# Altium PCB PCB1.PcbDoc
Units mm, origin at the board's own origin, x right, y up, seen from the top; angles counter-clockwise.
Board outline 86.99 x 68.2 mm, 2 copper layers (Top Layer, Bottom Layer); 32 components, 40 nets, 178 pads, 100 vias.
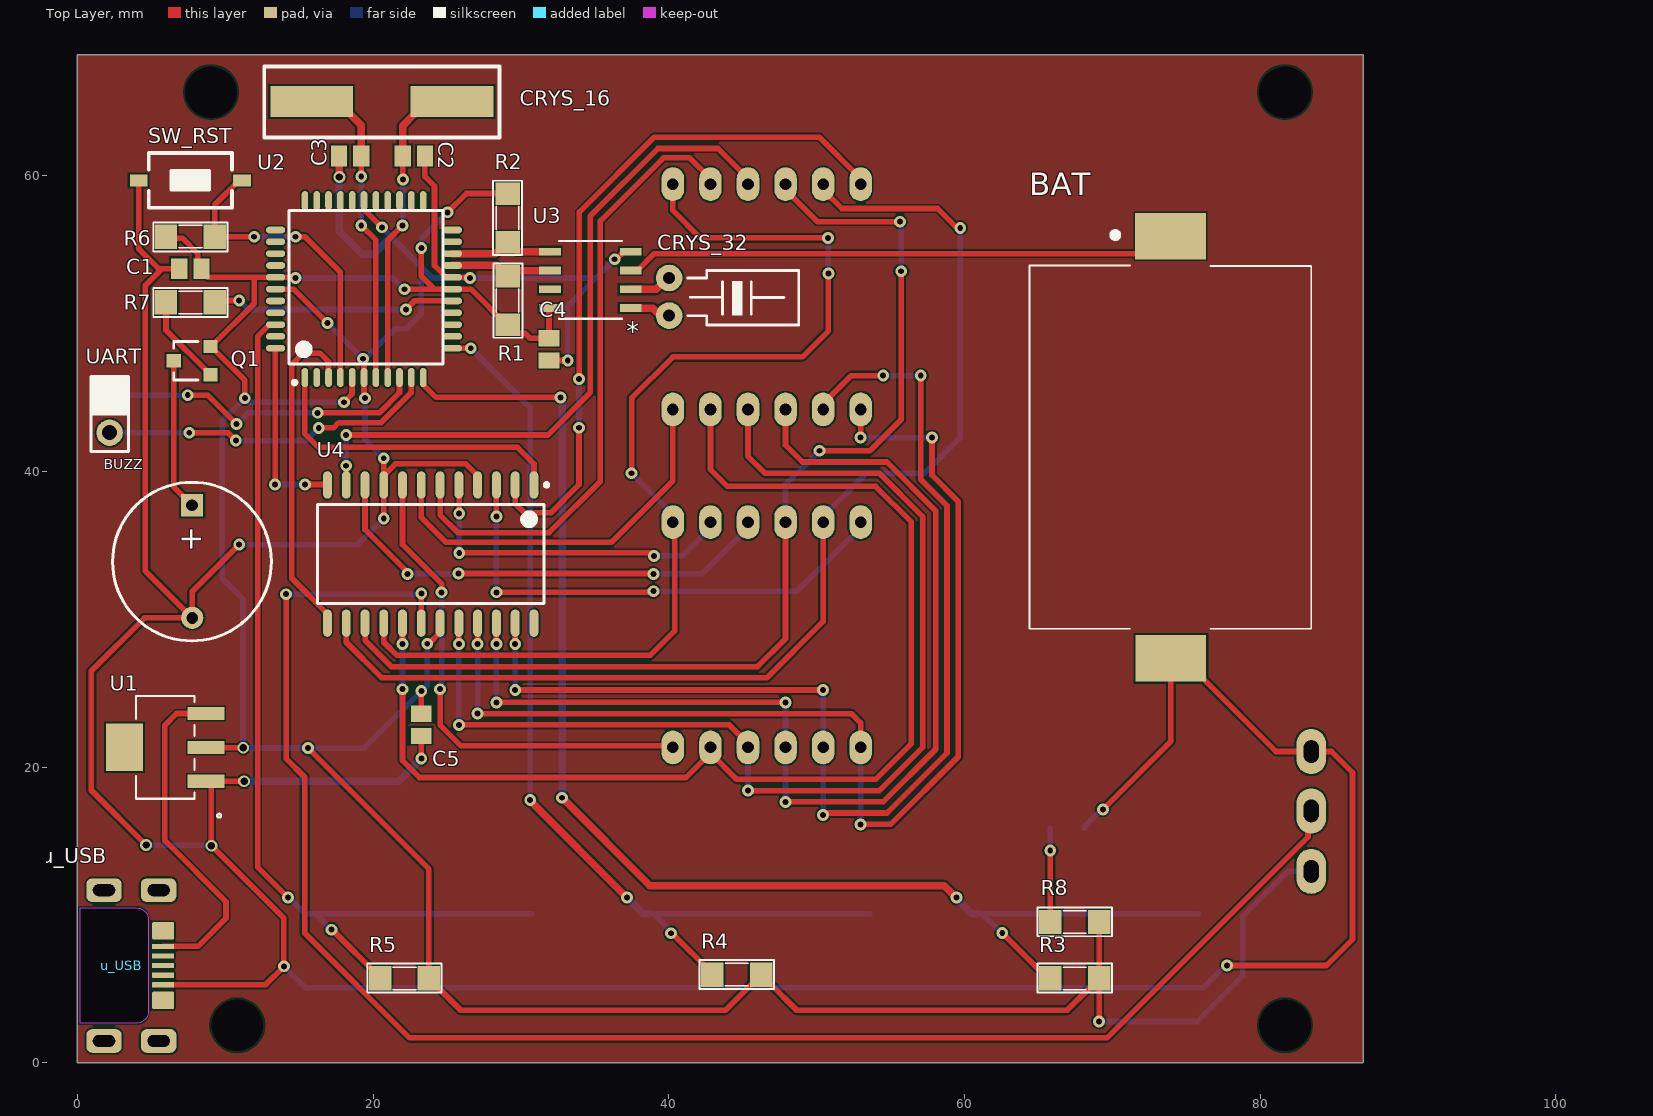
[diagram p0: Top Layer view]
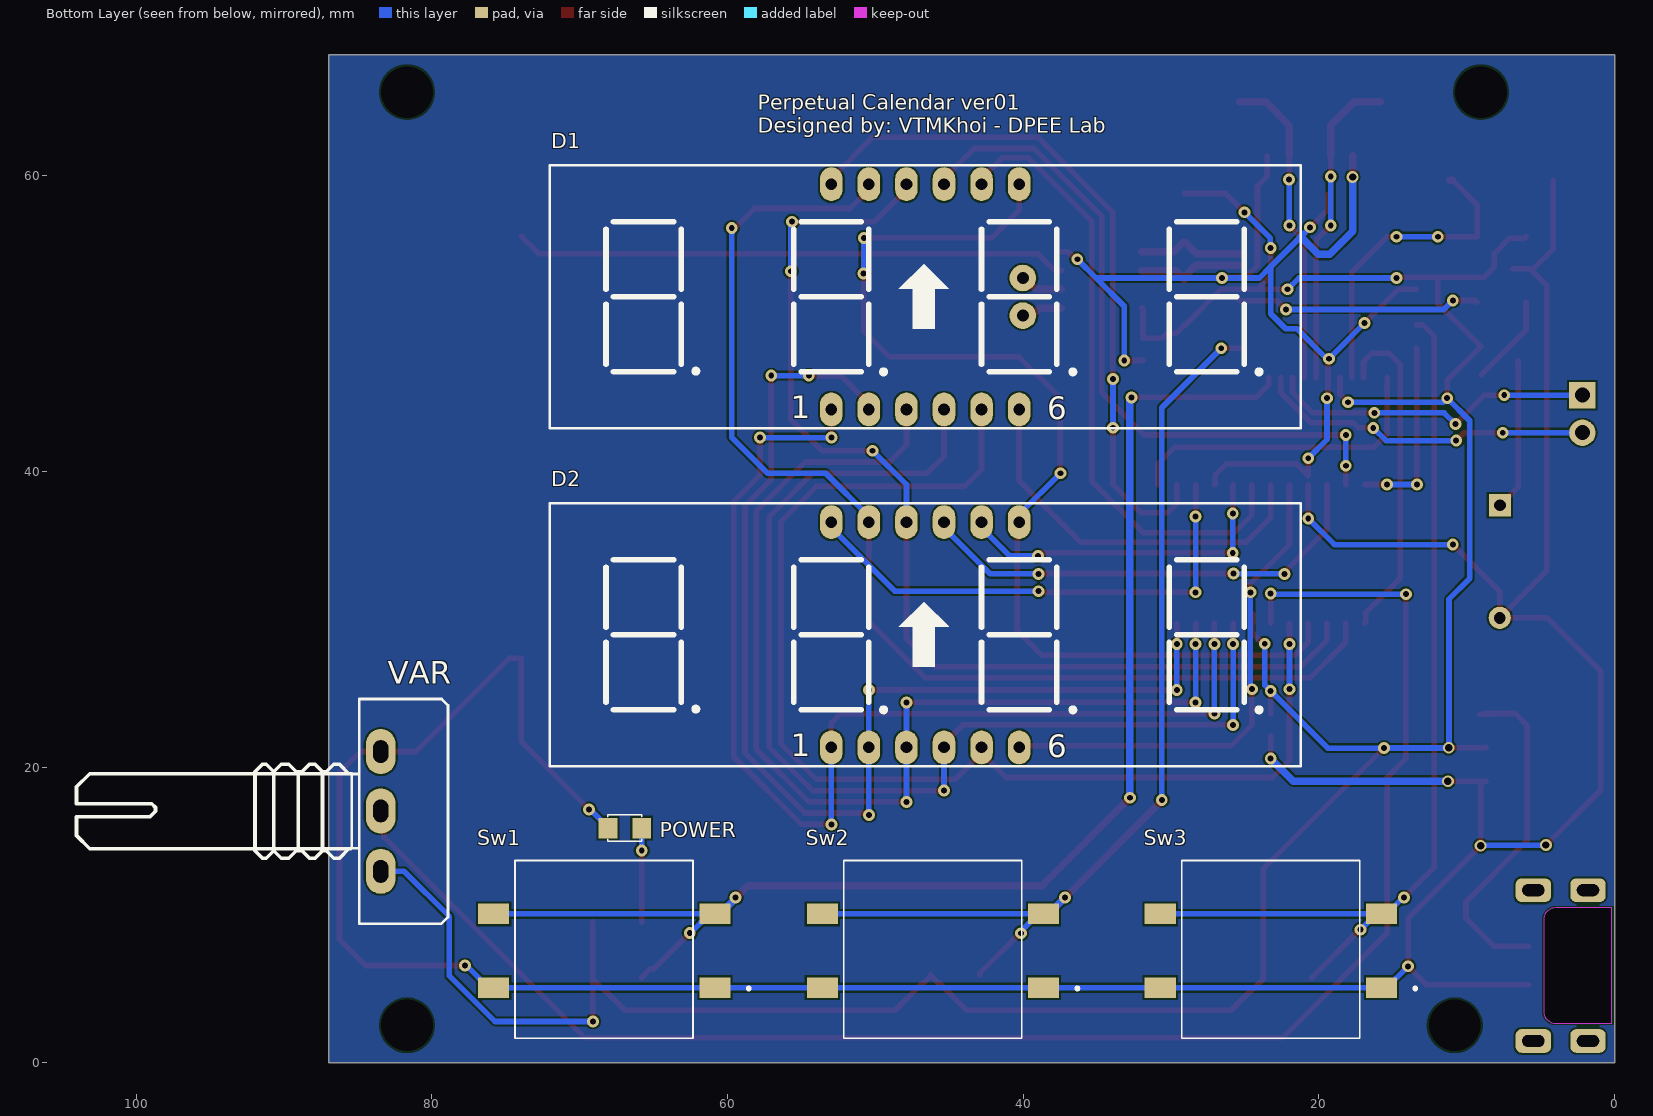
[diagram p1: Bottom Layer view, seen from below]

## Layer stack, top to bottom
Top Solder: solder mask 0.0102, Solder Resist, Dk 3.5
Top Layer: signal copper 0.0356
Dielectric 1: dielectric 0.32, FR-4, Dk 4.8
Bottom Layer: signal copper 0.0356
Bottom Solder: solder mask 0.0102, Solder Resist, Dk 3.5

## Board outline
0,0 0,68.199 86.995,68.199 86.995,0

## Design rules (kind name [scope] priority, off if disabled: settings)
Clearance [All] p1: gap=0.127 ignorepadtopadclearanceinfootprint=FALSE
PolygonConnect [All] p1: connectstyle=Relief reliefconductorwidth=0.254 reliefentries=4 polygonreliefangle="90 Angle" airgapwidth=0.254
RoutingVias [All] p1: holewidth=0.5 width=0.8 viastyle="Through Hole" minholewidth=0.4 minwidth=0.8 maxholewidth=0.6 maxwidth=0.8
SolderMaskExpansion [All] p1: expansion=0.102 istentingtop=FALSE
Width [All] p1: maxlimit=1.016 minlimit=0.254 preferedwidth=0.508
30 further rules are at their usual default settings.

## Components (designator, comment, footprint, x,y, rotation, side; value= is the part's Value field where it differs from the comment)
BAT "796136-1" TE_796136-1 73.939,42.037 r270 top
BUZZ "Buzzer" SPEAKER 7.76,37.719 r270 top
C1 "0.1uF" C0805 7.645,53.721 r0 top value=33p
C2 "22pF" C0805 22.758,61.341 r0 top value=33p
C3 "22pF" C0805 18.452,61.341 r180 top value=33p
C4 "0.1uF" C0805 31.902,48.26 r90 top value=33p
C5 "0.1uF" C0805 23.266,22.86 r90 top value=33p
CRYS_16 "16MHz" ABLS2-8.000MHZ-D4Y-T 20.599,65.024 r0 top value=8MHz
CRYS_32 "32.768Khz" XT32k 40.03,53.086 r0 top value=4Mhz
D1 "Above" 7SEGQ 52.984,44.196 r180 bottom value="LED 7Q SEG"
D2 "Below" 7SEGQ 52.984,21.336 r180 bottom value="LED 7Q SEG"
POWER "LED SMD" SM-LED-0805-Red 65.811,15.875 r0 bottom (schematic designator LED_R)
Q1 "SA1015" SOT23-321 7.772,47.498 r90 top value=A1015
R1 "4k7" SM-RES-1206 29.108,53.213 r270 top value="R1/4W - 1K"
R2 "4k7" SM-RES-1206 29.108,55.499 r90 top value="R1/4W - 1K"
R3 "1k" SM-RES-1206 65.811,5.715 r0 top value="R1/4W - 1K"
R4 "1k" SM-RES-1206 42.951,5.969 r0 top value="R1/4W - 1K"
R5 "1k" SM-RES-1206 20.472,5.715 r0 top value="R1/4W - 1K"
R6 "1k" SM-RES-1206 9.296,55.88 r180 top value="R1/4W - 1K"
R7 "1k" SM-RES-1206 9.296,51.435 r180 top value="R1/4W - 1K"
R8 "330r" SM-RES-1206 65.811,9.525 r0 top value="R1/4W - 1K"
Sw1 "Mode" SW_1571527-1 68.326,7.457 r0 bottom (schematic designator SW1)
Sw2 "Adjust" SW_1571527-1 46.101,7.457 r0 bottom (schematic designator SW2)
Sw3 "Increase" SW_1571527-1 23.241,7.457 r0 bottom (schematic designator SW3)
SW_RST "RST" SW1-SMD 7.645,59.69 r0 top value="SW chip 2 pin"
U1 "AMS1117" SOT_AMS_ADS 5.944,21.336 r90 top
U2 "ATmega32A-AU" TQFP44 19.392,52.336 r90 top
U3 "ds1307zn+" 21-0041B_8_MXM 34.696,52.959 r180 top
U4 "MAX7219ENG" SO24 23.901,34.417 r270 top
u_USB "POWER" USB-Micr-B-FCI-SMD 0.203,6.579 r270 top
UART "" HEADER-1X2 2.184,45.161 r0 top
VAR "10K" VR-S1 83.464,17.018 r270 bottom value="Volume 50k"

## Footprints (in the part's own frame and the unit in brackets; to place one, negate y for a bottom-side part, rotate by r counter-clockwise, add the part's x,y. Pads: shape width x height; smd on the part's side, far side on the other; paste and mask are expansions set on the pad)
7SEGQ [mil] "DIP 12 Leads; Body 48 x 20 mm; Pitch 0.5 mm"
  oval 60x90 hole 31: 1(0,0) 2(100,0) 3(200,0) 4(300,0) 5(400,0) 6(500,0) 7(500,600) 8(400,600) 9(300,600) 10(200,600) 11(100,600) 12(0,600)
  silkscreen extent -750,-50 1250,650, body extent -720,-80 1260,668, height 565
21-0041B_8_MXM [mil]
  rect 57.5x21 smd paste+0 mask+0: 1(-107.25,75) 2(-107.25,25) 3(-107.25,-25) 4(-107.25,-75) 5(107.25,-75) 6(107.25,-25) 7(107.25,25) 8(107.25,75)
  silkscreen extent -84,-104 84,104, body extent -122,-99 122,99, height 69
ABLS2-8.000MHZ-D4Y-T [mm]
  rect 5.6x2.1 smd: 1(-4.75,0) 2(4.75,0)
  silkscreen extent -7.95,-2.44 7.95,2.36
C0805 [mm] "Chip Capacitor, Body 2.0x1.3mm, IPC High Density"
  rect 1.1x1.4 smd: 1(-0.75,0) 2(0.75,0)
  body extent -1.1,-0.72 1.1,0.72, height 1.4
HEADER-1X2 [mil]
  rect 70x70 hole 40: 1(0,0)
  round 70 hole 40: 2(0,-100)
  silkscreen extent -50,-150 50,50, body extent -50,-150 50,50, height 470
SM-LED-0805-Red [mil]
  rect 50x55 smd: 1(0,0) 2(90,0)
  silkscreen extent 0,-35 90,35, body extent 5,-25 85,25, height 43
SM-RES-1206 [mil]
  rect 60x65 smd: 1(0,0) 2(130,0)
  silkscreen extent -34,-38 164,39, body extent 2,-31 128,32, height 40
SO24 [mm] "SOIC, 24-Leads, Body 15.30x7.50mm, Pitch 1.27mm, IPC Medium Density"
  oval 1.85x0.6 smd: 1(-4.675,6.985) 2(-4.675,5.715) 3(-4.675,4.445) 4(-4.675,3.175) 5(-4.675,1.905) 6(-4.675,0.635) 7(-4.675,-0.635) 8(-4.675,-1.905) 9(-4.675,-3.175) 10(-4.675,-4.445) 11(-4.675,-5.715) 12(-4.675,-6.985) 13(4.675,-6.985) 14(4.675,-5.715) 15(4.675,-4.445) 16(4.675,-3.175) 17(4.675,-1.905) 18(4.675,-0.635) 19(4.675,0.635) 20(4.675,1.905) 21(4.675,3.175) 22(4.675,4.445) 23(4.675,5.715) 24(4.675,6.985)
  silkscreen extent -4.8,-7.65 3.35,7.96, body extent -5.2,-7.83 5.2,7.57, height 2.6
SOT23-321 [mm]
  rect 0.9x0.95 smd mask+0: 1(0.95,-1.25)
  rect 0.9x0.95 smd: 2(0,1.25) 3(-0.95,-1.25)
  silkscreen extent -1.3,-0.38 1.3,1.25, body extent -1.52,-1.23 1.48,1.27, height 1.06
SOT_AMS_ADS [mil]
  rect 35x98 smd paste+0 mask+0: 1(-90.16,-108.5) 2(0,-108.5) 3(90.16,-108.5)
  rect 126x98 smd paste+0 mask+0: 4(0,108.5)
  silkscreen extent -187,-148 137,78, body extent -132,-143 132,144, height 71
SPEAKER [mm]
  rect 1.5x1.5 hole 0.8: 1(0,0)
  round 1.5 hole 0.8: 2(7.62,0.013)
  silkscreen extent -1.55,-5.38 9.18,5.36, body extent -2.22,-6 13.24,6, height 3.5
SW1-SMD [mm]
  rect 1.2x0.8 smd: 1(-3.5,0) 2(3.5,0)
  silkscreen extent -2.82,-1.85 2.82,1.85, body extent -3.05,-1.85 3.05,1.85, height 2.5
SW_1571527-1 [mm]
  rect 2.1x1.4 smd: 1(-7.468,2.377) 2(7.496,2.377) 3(-7.468,-2.623) 4(7.496,-2.623)
  silkscreen extent -9.85,-6.22 6.05,5.79
TE_796136-1 [mm]
  rect 3.15x4.78 smd: 1(-13.868,0) 2(14.681,0.025)
  silkscreen extent -14.16,-9.53 12.67,9.53
TQFP44 [mm] "TQFP, 44-Leads, Body 10X10mm, Pitch 0.80mm, IPC High Density"
  oval 1.3x0.45 smd: 1(-5.981,4) 2(-5.981,3.2) 3(-5.981,2.4) 4(-5.981,1.6) 5(-5.981,0.8) 6(-5.981,0) 7(-5.981,-0.8) 8(-5.981,-1.6) 9(-5.981,-2.4) 10(-5.981,-3.2) 11(-5.981,-4) 23(5.981,-4) 24(5.981,-3.2) 25(5.981,-2.4) 26(5.981,-1.6) 27(5.981,-0.8) 28(5.981,0) 29(5.981,0.8) 30(5.981,1.6) 31(5.981,2.4) 32(5.981,3.2) 33(5.981,4)
  oval 0.45x1.3 smd: 12(-4,-5.981) 13(-3.2,-5.981) 14(-2.4,-5.981) 15(-1.6,-5.981) 16(-0.8,-5.981) 17(0,-5.981) 18(0.8,-5.981) 19(1.6,-5.981) 20(2.4,-5.981) 21(3.2,-5.981) 22(4,-5.981) 34(4,5.981) 35(3.2,5.981) 36(2.4,5.981) 37(1.6,5.981) 38(0.8,5.981) 39(0,5.981) 40(-0.8,5.981) 41(-1.6,5.981) 42(-2.4,5.981) 43(-3.2,5.981) 44(-4,5.981)
  silkscreen extent -6.45,-5.33 5.33,5.07, body extent -5.99,-5.96 6.01,6.04, height 1.05
USB-Micr-B-FCI-SMD [mm]
  round 0.508 on Mech15: 0(0,0)
  rrect20% 0.35x1.5 smd: 1(-1.3,5.6) 2(-0.65,5.6) 3(0,5.6) 4(0.65,5.6) 5(1.3,5.6)
  rrect50% 1.6x2.4 hole 0.8 slot 1.5 at 90 deg: SH(-5.1,5.3) SH(-5.1,1.6) SH(5.1,5.3) SH(5.1,1.6)
  rrect20% 1.2x1.5 smd: SH(-2.35,5.6) SH(2.35,5.6)
  Keep-Out Layer board cut-out: -3.9,0 -3.9,3.797 -3.839,4.103 -3.666,4.362 -3.406,4.536 -3.1,4.597 -3.1,4.597 3.1,4.597 3.406,4.536 3.666,4.362 3.839,4.103 3.9,3.797 3.9,3.797 3.9,0
  body extent -5.25,-1.12 5.25,5.8, height 2.15
VR-S1 [mil]
  oval 120x78.74 hole 40 slot 60 at 0 deg: 1(-159,0) 2(-1,0) 3(160,0)
  silkscreen extent -299,-810 300,179, body extent -310,-818 310,188, height 840
XT32k [mm]
  round 1.8 hole 0.813: 1(0,0) 2(0,-2.54)
  silkscreen extent 1.27,-3.17 8.76,0.51, body extent -0.15,-2.42 8.2,-0.12, height 1.95

## Part data
BAT: "BATTERY HOLDER; No. of Batteries:1; Terminal Type:Surface Mount; For Use With:CR2032 Batteries; Accessory Type:Battery Holder; Battery Size Code:2032", Package=None, Availability=Unavailable, EU_RoHS_Compliance=Compliant, MF="TE Connectivity", MP=796136-1, Number_of_Positions=2, Price=None, SnapEDA_Link=https://www.snapeda.com/parts/796136-1/TE%20Connectivity%20AMP%20Connectors/view-part/761452/?ref=snap, TE_purchase_URL=https://www.te.com/usa-en/product-796136-1.html?te_bu=Cor&te_type=disp&te_campaign=seda_glo_cor-seda-global-disp-prtnr-fy19-seda-model-bom-cta_sma-317_1&elqCampaignId=32493
C1 C2 C3 C4 C5: library part CapSMD, "Capacitor", LatestRevisionDate=17-Jul-2002, LatestRevisionNote="Re-released for DXP Platform.", PackageReference=RAD-0.3, Published=8-Jun-2000, Publisher="Altium Limited"
CRYS_16: library part ABLS2-8.000MHZ-D4Y-T, "Crystal, 8 MHz, SMD, 11.4mm x 4.7mm, 30 ppm, 18 pF, 30 ppm, ABLS2 Series", Manufacturer=ABRACON, Component Type=Crystal, Manufacturer Part No=ABLS2-8.000MHZ-D4Y-T
CRYS_32: library part XT2, "Crystal, 32.768 KHz, -40 to 85 degC, 3.2 x 1.5 x 0.9 mm SMD"
D1 D2: library part LED7Q, "Four 7 Seg Dipslay"
POWER: library part LED-SMD-0805
Q1: library part 2SA1015, "PNP 600mW, ECB"
R1 R2 R3 R4 R5 R6: library part R, "Resistor 1/4W"
R7 R8: library part R, "Resistor for buzzer"
Sw1 Sw2 Sw3: library part 1571527-1, "Switch Tactile OFF _ON_ Round Button Gull Wing 0.05A 12VDC 0.98N SMD Bulk", Package="SMD-6 Omron Electronics", Availability=Unavailable, EU_RoHS_Compliance=Compliant, MF="TE Connectivity", MP=1571527-1, Price=None, SnapEDA_Link=https://www.snapeda.com/parts/1571527-1/TE%20Connectivity/view-part/244428/?ref=snap, TE_purchase_URL=https://www.te.com/usa-en/product-1571527-1.html?te_bu=Cor&te_type=disp&te_campaign=seda_glo_cor-seda-global-disp-prtnr-fy19-seda-model-bom-cta_sma-317_1&elqCampaignId=32493
SW_RST: library part SW2, "Switch button 2 pin"
U1: "No Description Available", Built_By=EMA_Matt, Copyright="Copyright (C) 2018 Accelerated Designs. All rights reserved", Manufacturer_Part_Number=AMS1117, RefDes=RefDes, SourceLibrary=Advanced_Monolithic_Systems_10-16-2019, Type=DEV, Vendor="Advanced Monolithic Systems"
U2: "8/16-bit AVR XMEGA A4 Microcontroller, 1.6-3.6V, 32KB + 4KB Flash, 1KB EEPROM, 4KB SRAM, 44-pin TQFP, Industrial Grade (-40°C to 85°C), Pb-Free", Supplier Part Number 1=ATXMEGA32A4-AU-ND, ComponentLink1Description="Manufacturer Link", ComponentLink1URL=http://www.atmel.com/products/avr/default.asp?, ComponentLink2Description="ATxmega16A4/32A4/64A4/128A4 Datasheet", ComponentLink2URL=http://www.atmel.com/dyn/resources/prod_documents/doc8069.pdf, ComponentLink3Description="Atmel.com Home", ComponentLink3URL=http://www.atmel.com, DatasheetVersion="revN, Feb-2010", PackageDescription="44-Pin Plastic Thin Profile Quad Flat Pack, 10 x 10 x 1.0 mm Body, 0.8 mm Pitch (TQFP)", PackageReference=44A, PackageVersion="rev.B, Oct-2001", Published=1-Apr-2010, Publisher="Altium Limited", Supplier 1=Digi-Key, Supplier 2=Farnell, Supplier 3=Mouser, Supplier Part Number 2=1748557, Supplier Part Number 3=556-ATXMEGA32A4-AU
U3: "No Description Available", Mfr_Name="Maxim Integrated Products", Copyright="Copyright (C) 2021 Ultra Librarian. All rights reserved.", Manufacturer_Part_Number=ds1307zn+, RefDes=RefDes, Type=DEV
U4: "Serially Interfaced, 8-Digit LED Display Driver", Code_JEDEC=MS-001-AF, ComponentLink1Description="Manufacturer Link", ComponentLink1URL=http://www.maxim-ic.com/, ComponentLink2Description=Datasheet, ComponentLink2URL=http://pdfserv.maxim-ic.com/en/ds/MAX7219-MAX7221.pdf, DatasheetVersion=Jul-1997, LatestRevisionDate=29-May-2009, LatestRevisionNote="Component Body Added.", PackageDescription="DIP, 24-Pin, Row Spacing 7.62 mm, Pitch 2.54 mm", PackageReference=NG24A, PackageVersion=1997, Published=16-Jan-2001, Publisher="Altium Limited"
u_USB: library part "USB M"
UART: library part HEADER-1X2, Supplier Part Number 1=S1011E-36-ND, REEL=TH, Supplier 1=Digi-Key
VAR: library part VR-S, "Var Resistor"

## Free pads (board coordinates)
  round 1.524 hole 3.5: 2(10.82,2.54) 2(81.686,2.54) 2(81.686,65.659) 3(9.042,65.659)

## Via types
v1: diameter 0.8/0.8 (per signal layer), hole 0.4, Top Layer to Bottom Layer, 94 vias
v2: diameter 0.8, hole 0.5, Top Layer to Bottom Layer, 5 vias
v3: diameter 0.8, hole 0.4, Top Layer to Bottom Layer, 1 vias

## Nets (pads, with @x,y where several pads share a name; then routed paths per layer and width w, separated by ;. In a path a pad name is that pad's centre, name@x,y a point inside that pad or via, vN(x,y) a via of type N, cw(c..) or ccw(c..) an arc to the next point about the centre after c; other vN are vias at no path point)
Adjust: R4.1 Sw2.3 Sw2.4 U2.12 | length 65.5
  Top Layer w0.381: U2.12 v1(26.61,48.336) v1@26.661,48.387 ; v1(40.157,8.763) 40.221,8.763 42.951,6.033 R4.1
  Top Layer w0.508: v1(30.632,17.78) 30.632,17.725 v1(37.181,11.176)
  Bottom Layer w0.381: v1(26.61,48.336) 30.632,44.314 v1(30.632,17.78) ; Sw2.3 Sw2.3@38.983,10.08 ; v1(40.157,8.763) 40.133,8.787 40.133,8.93 Sw2.3@38.983,10.08 ; Sw2.4 Sw2.3@38.983,10.08
  Bottom Layer w0.508: v1(37.181,11.176) 37.187,11.176 38.283,10.08 Sw2.3
Buzzer: R7.1 U2.16 | length 16.6
  Top Layer w0.381: R7.1 9.423,51.562 v1(10.947,51.562) ; v1(22.225,50.952) 22.822,51.549 25.36,51.549 U2.16
  Bottom Layer w0.381: v1(10.947,51.562) 11.557,50.952 v1(22.225,50.952)
CLK: U2.3 U4.13 | length 22.6
  Top Layer w0.381: U4.13 16.845,29.814 16.845,30.439 14.503,32.78 14.503,47.244 15.265,48.006 16.408,48.006 16.992,47.422 U2.3
Dig0: D1.12 U4.2 | length 47.7
  Top Layer w0.381: U4.2 29.616,37.846 30.251,37.211 32.029,37.211 33.934,39.116 v1(33.934,42.958) ; v1(33.934,46.253) 33.96,46.279 33.96,57.556 39.014,62.611 50.19,62.611 52.984,59.817 D1.12
  Bottom Layer w0.381: v1(33.934,42.958) v1(33.934,46.253)
Dig1: D1.9 U4.11 | length 46.8
  Top Layer w0.381: U4.11 v3(18.186,40.386) ; v1(18.186,42.469) 31.826,42.469 34.696,45.339 34.696,57.277 39.268,61.849 43.332,61.849 45.364,59.817 D1.9
  Bottom Layer w0.381: v3(18.186,40.386) v1(18.186,42.469)
Dig2: D1.8 U4.6 | length 42.6
  Top Layer w0.381: U4.6 24.536,37.059 25.73,35.865 31.91,35.865 35.382,39.337 35.382,56.947 39.649,61.214 41.427,61.214 42.824,59.817 D1.8
Dig3: D1.6 U4.7 | length 26.5
  Top Layer w0.381: U4.7 23.266,36.881 24.937,35.211 36.125,35.211 40.284,39.37 D1.6
Dig4: D2.12 U4.3 | length 34.1
  Top Layer w0.381: v1(28.346,31.826) 38.887,31.826 v1(38.964,31.902) ; v1(28.346,36.957) U4.3
  Bottom Layer w0.381: v1(28.346,31.826) v1(28.346,36.957) ; v1(38.964,31.902) 48.692,31.902 52.984,36.195 D2.12
Dig5: D2.9 U4.10 | length 32
  Top Layer w0.381: U4.10@19.437,39.073 U4.10 19.456,36.068 22.327,33.198 v1(22.327,33.071) ; v1(25.781,33.096) 38.938,33.096 v1(38.964,33.071) ; D2.9@45.345,36.557 D2.9
  Bottom Layer w0.381: v1(22.327,33.071) 25.756,33.071 v1(25.781,33.096) ; v1(38.964,33.071) 42.24,33.071 45.364,36.195 D2.9
Dig6: D2.8 U4.5 | length 22.9
  Top Layer w0.381: U4.5 25.829,39.07 v1(25.829,37.163) ; v1(25.832,34.493) 38.811,34.493 v1(39.014,34.29)
  Bottom Layer w0.381: v1(25.829,37.163) 25.832,37.16 v1(25.832,34.493) ; v1(39.014,34.29) 40.919,34.29 42.824,36.195 D2.8
Dig7: D2.6 U4.8 | length 33.7
  Top Layer w0.381: U4.8 21.996,35.052 24.638,32.41 v1(24.638,31.826) ; v1(24.536,25.273) 24.536,22.86 25.958,21.439 40.182,21.439 D2.6
  Bottom Layer w0.381: v1(24.536,25.273) 24.638,25.375 v1(24.638,31.826)
DIN: U2.1 U4.1 | length 21.6
  Top Layer w0.381: U2.1 15.392,42.545 16.307,41.631 29.769,41.631 30.886,40.513 U4.1
GND: BAT.2 BUZZ.2 C1.1 C2.2 C3.2 C4.1 C5.1 POWER.2 Sw1.1 Sw1.2 Sw2.1 Sw2.2 Sw3.1 Sw3.2 SW_RST.1 U1.1 U2.6 U2.18 U2.28 U2.39 U3.4 U4.4 U4.9 u_USB.5 VAR.1 | length 315.5
  Top Layer w0.381: SW_RST.1 4.145,55.062 5.486,53.721 5.74,53.721 ; v2(4.648,14.732) 0.94,18.44 0.94,26.492 4.547,30.099 BUZZ.2 ; u_USB.5 12.721,5.279 v1(13.97,6.528) 13.97,9.779 v2(9.068,14.681) 9.068,18.792 8.814,19.046 U1.1 8.702,19.048 11.276,19.048 v2(11.278,19.05) ; C1.1 5.74,53.721 ; v1(10.947,35.052) 7.772,31.877 BUZZ.2 ; U2.39 14.618,52.336 v1(16.916,50.038) ; v1(19.329,47.625) 19.329,47.591 19.392,47.528 U2.6 19.392,45.056 19.456,44.992 v1(19.456,44.958) ; U2.28@19.392,58.742 U2.28 19.392,57.722 v1(20.599,56.515) ; v1(20.726,36.83) U4.9 ; U4.9@20.726,39.717 21.522,40.513 26.28,40.513 27.005,39.789 27.005,39.164 U4.4 ; U4.9@20.726,39.789 v1(20.726,40.894) ; v1(23.266,20.574) C5.1 ; C2.2 23.508,59.956 24.155,59.309 24.155,53.929 24.926,53.159 25.351,53.159 U2.18 26.484,53.136 26.534,53.086 v1(26.568,53.086) ; C4.1 31.908,47.504 33.166,47.504 v1(33.169,47.501) ; v1(36.347,54.356) 36.372,54.38 36.473,54.38 36.957,54.864 U3.4 ; v1(69.367,17.145) 73.965,21.742 BAT.2 74.78,27.356 81.079,21.057 VAR.1 84.836,21.057 86.258,19.634 86.258,8.351 84.487,6.58 v1(77.762,6.58) ; 5.74,53.721 4.597,52.578 4.597,33.274 BUZZ.2
  Top Layer w0.508: C3.2 17.716,61.328 17.716,59.932 v2(17.729,59.919)
  Bottom Layer w0.381: v2(4.648,14.732) 4.674,14.707 9.042,14.707 v2(9.068,14.681) ; v1(10.947,35.052) 18.948,35.052 v1(20.726,36.83) ; v1(13.97,6.528) 13.976,6.528 15.423,5.08 Sw3.1 Sw3.2 Sw2.1 Sw2.2 Sw1.1 Sw1.2 76.172,5.08 77.672,6.58 v1(77.762,6.58) ; v1(16.916,50.038) v1(19.329,47.625) 19.354,47.649 19.481,47.649 21.488,49.657 22.25,49.657 23.266,50.673 23.266,53.848 ; v1(19.456,44.958) 19.456,42.164 v1(20.726,40.894) ; v1(20.599,56.515) 21.234,55.88 23.266,53.848 ; 21.742,19.05 21.806,19.114 ; v1(33.169,47.501) 33.169,51.178 35.077,53.086 ; v1(36.347,54.356) 35.077,53.086 ; POWER.2 68.097,15.939 69.28,17.121 69.343,17.121 v1(69.367,17.145) ; 23.266,53.848 24.028,53.086 v1(26.568,53.086) 35.077,53.086
  Bottom Layer w0.508: v2(11.278,19.05) 21.742,19.05 ; v2(17.729,59.919) 17.729,56.236 19.279,54.686 20.041,54.686 21.234,55.88 ; 21.806,19.114 v1(23.266,20.574)
Incr: R5.1 Sw3.3 Sw3.4 U2.42 | length 63.5
  Top Layer w0.381: U2.42 13.005,49.936 12.192,49.123 12.192,13.233 v1(14.249,11.176) ; v1(17.199,9.004) 17.247,9.004 20.472,5.779 R5.1
  Bottom Layer w0.381: v1(14.249,11.176) 14.274,11.152 14.352,11.152 15.423,10.08 Sw3.3 Sw3.3@16.123,10.08 ; v1(17.199,9.004) Sw3.3@16.123,10.08 ; Sw3.4 Sw3.3@16.123,10.08
LOAD: U2.44 U4.12 | length 12.8
  Top Layer w0.381: v1(13.36,39.116) 13.385,39.14 13.385,48.309 U2.44 ; v1(15.392,39.116) 16.892,39.116 U4.12
  Bottom Layer w0.381: v1(13.36,39.116) v1(15.392,39.116)
Mode: R3.1 Sw1.3 Sw1.4 U2.11 | length 90
  Top Layer w0.381: U2.11 23.406,46.342 23.406,45.86 24.257,45.009 v1(32.69,45.009) ; v1(62.561,8.787) 64.998,6.35 65.24,6.35 65.811,5.779 R3.1
  Top Layer w0.508: v1(32.791,17.932) 38.735,11.989 58.649,11.989 v1(59.461,11.176)
  Bottom Layer w0.381: Sw1.3 Sw1.3@61.208,10.08 ; v1(62.561,8.787) 62.501,8.787 Sw1.3@61.208,10.08 ; Sw1.4 Sw1.3@61.208,10.08
  Bottom Layer w0.508: v1(32.69,45.009) 32.791,44.907 v1(32.791,17.932) ; v1(59.461,11.176) 59.461,11.127 60.508,10.08 Sw1.3
NetBAT_1: BAT.1 U3.3 | length 37.5
  Top Layer w0.381: U3.3 37.884,53.594 39.027,54.737 72.771,54.737 BAT.1
NetBUZZ_1: BUZZ.1 Q1.2 | length 10.3
  Top Layer w0.381: Q1.2@6.547,47.498 Q1.2 6.522,38.956 BUZZ.1
NetCRYS_32_1: CRYS_32.1 U3.2 | length 2.8
  Top Layer w0.508: U3.2 39.173,52.324 39.681,52.832 CRYS_32.1@40.03,52.832
NetCRYS_32_2: CRYS_32.2 U3.1 | length 2.9
  Top Layer w0.508: U3.1 38.919,51.054 39.681,50.292 CRYS_32.2@40.03,50.292
NetLED_R_1: POWER.1 R8.1 | length 6.3
  Top Layer w0.381: R8.1 v1(65.811,14.351)
  Bottom Layer w0.381: v1(65.811,14.351) POWER.1
NetQ1_3: Q1.3 R7.2 | length 6.2
  Top Layer w0.381: R7.2 5.994,49.551 8.997,46.548 Q1.3
NetU1_3: U1.3 u_USB.1 | length 23.7
  Top Layer w0.381: u_USB.1 8.158,7.879 10.058,9.779 10.058,10.897 5.918,15.037 5.918,22.835 6.71,23.626 U1.3 ; U1.3@8.331,23.575 U1.3@9.131,23.575
NetU4_18: U4.18 VAR.2 | length 112.9
  Top Layer w0.381: v1(14.122,31.699) 14.122,20.578 15.381,19.319 15.381,8.77 22.465,1.686 69.656,1.686 83.247,15.276 83.247,16.826 VAR.2 ; U4.18 v1(23.266,31.75)
  Bottom Layer w0.381: v1(14.122,31.699) 23.216,31.699 v1(23.266,31.75)
Reset: R6.1 SW_RST.2 U2.4 | length 21.3
  Top Layer w0.381: SW_RST.2@10.945,59.69 9.296,58.041 R6.1 v1(11.963,55.88) ; v1(14.757,55.88) 15.392,55.88 17.792,53.48 U2.4
  Top Layer w0.508: SW_RST.2@10.945,59.69 SW_RST.2
  Bottom Layer w0.381: v1(11.963,55.88) v1(14.757,55.88)
RXD: U2.9 UART.1 | length 22.3
  Top Layer w0.381: v1(7.468,45.161) 8.814,45.161 v1(10.77,43.205) ; v1(16.256,43.967) 20.417,43.967 21.792,45.342 U2.9
  Bottom Layer w0.381: UART.1 v1(7.468,45.161) ; v1(10.77,43.205) 11.532,43.967 v1(16.256,43.967)
SCL: R1.1 U2.19 U3.6 | length 7.4
  Top Layer w0.508: U2.19 28.322,53.936 29.108,53.15 R1.1@29.108,53.023 ; R1.1@29.108,52.959 R1.1@29.108,53.023 ; U3.6 29.68,53.594 R1.1@29.108,53.023
SDA: R2.1 U2.20 U3.5 | length 7.2
  Top Layer w0.508: U2.20 28.282,54.736 29.045,55.499 R2.1 29.172,55.499 29.807,54.864 U3.5
segA: D1.11 D2.11 U4.14 | length 79.6
  Top Layer w0.381: U4.14 18.186,28.448 20.599,26.035 46.634,26.035 50.444,29.845 D2.11 ; D1.11 50.444,59.055 51.714,57.785 58.191,57.785 59.499,56.477 v1(59.723,56.477)
  Bottom Layer w0.381: D2.11 50.444,36.957 53.365,39.878 57.302,39.878 59.723,42.298 v1(59.723,56.477)
segB: D1.7 D2.7 U4.16 | length 73.5
  Top Layer w0.381: U4.16 20.726,28.451 21.618,27.559 38.748,27.559 40.399,29.21 40.399,36.461 D2.7 ; v1(37.49,39.878) 37.49,44.958 40.284,47.752 49.047,47.752 50.8,49.505 v1(50.8,53.391) ; D1.7 40.284,57.658 42.139,55.804 v1(50.775,55.804)
  Bottom Layer w0.381: v1(37.49,39.878) 40.284,37.084 D2.7 ; v1(50.775,55.804) 50.8,55.778 v1(50.8,53.391)
segC: D1.4 D2.4 U4.20 | length 75.5
  Top Layer w0.381: v1(25.806,22.86) 44.094,22.86 45.364,21.59 D2.4 ; v1(25.806,28.321) U4.20 ; v1(45.364,18.415) 54.254,18.415 57.175,21.336 57.175,36.957 54.254,39.878 46.507,39.878 45.364,41.021 D1.4
  Bottom Layer w0.381: v1(25.806,22.86) v1(25.806,28.321) ; v1(45.364,18.415) D2.4
segD: D1.2 D2.2 U4.23 | length 78
  Top Layer w0.381: v1(29.616,25.222) v1(50.444,25.222) ; v1(29.616,28.321) U4.23 ; v1(50.444,16.764) 50.479,16.764 50.61,16.896 54.767,16.896 58.826,20.955 58.826,37.68 57.048,39.458 v1(57.048,46.482) ; D1.2 50.444,44.577 52.349,46.482 v1(54.508,46.482)
  Bottom Layer w0.381: v1(29.616,25.222) v1(29.616,28.321) ; v1(50.444,16.764) D2.2 v1(50.444,25.222) ; v1(54.508,46.482) v1(57.048,46.482)
segDP: D1.3 D2.3 U4.22 | length 73.8
  Top Layer w0.381: v1(28.346,24.384) v1(47.904,24.384) ; v1(28.346,28.321) U4.22 ; v1(47.904,17.653) 54.508,17.653 58.064,21.209 58.064,37.338 54.762,40.64 49.047,40.64 47.904,41.783 D1.3
  Bottom Layer w0.381: v1(28.346,24.384) v1(28.346,28.321) ; v1(47.904,17.653) D2.3 v1(47.904,24.384)
segE: D1.1 D2.1 U4.21 | length 76.7
  Top Layer w0.381: v1(27.076,23.622) 52.349,23.622 52.984,22.987 D2.1 ; v1(27.076,28.321) U4.21 ; v1(52.984,16.129) 55.016,16.129 59.588,20.701 59.588,37.973 57.81,39.751 v1(57.81,42.291) ; v1(52.984,42.291) D1.1
  Bottom Layer w0.381: v1(27.076,23.622) v1(27.076,28.321) ; v1(52.984,16.129) D2.1 ; v1(52.984,42.291) v1(57.81,42.291)
segF: D1.10 D2.10 U4.15 | length 73.6
  Top Layer w0.381: U4.15 19.484,29.714 19.484,28.547 21.234,26.797 46.015,26.797 47.904,28.687 D2.10 ; D1.10 47.904,59.055 50.063,56.896 v1(55.651,56.896) ; v1(50.19,41.402) 53.619,41.402 55.728,43.51 v1(55.728,53.543)
  Bottom Layer w0.381: D2.10 47.904,39.116 v1(50.19,41.402) ; v1(55.651,56.896) 55.728,56.82 v1(55.728,53.543)
segG: D1.5 D2.5 U4.17 | length 81.1
  Top Layer w0.381: v1(21.996,25.273) 21.996,20.447 23.139,19.304 41.173,19.304 D2.5@42.824,20.955 ; v1(21.996,28.321) U4.17 ; D2.5 D2.5@42.824,20.955 ; D1.5 42.824,40.132 43.967,38.989 54,38.989 56.413,36.576 56.413,21.59 54,19.177 44.602,19.177 D2.5@42.824,20.955
  Bottom Layer w0.381: v1(21.996,25.273) v1(21.996,28.321)
TXD: U2.10 UART.2 | length 23
  Top Layer w0.381: v1(7.569,42.621) 10.185,42.621 v1(10.719,42.088) ; v1(16.332,42.951) 17.318,42.951 17.674,43.307 20.557,43.307 22.579,45.329 22.579,46.342 U2.10
  Bottom Layer w0.381: UART.2 v1(7.569,42.621) ; v1(10.719,42.088) 15.469,42.088 v1(16.332,42.951)
VCC_5V: C1.2 C4.2 C5.2 Q1.1 R1.2 R2.2 R3.2 R4.2 R5.2 R6.2 R8.2 U1.2 U2.5 U2.17 U2.38 U3.8 U4.19 VAR.3 | length 209.8
  Top Layer w0.381: R6.2 6.089,55.786 7.105,55.786 8.134,54.756 8.134,53.832 8.83,53.136 11.963,53.136 ; U1.2 8.712,21.323 11.214,21.323 v2(11.227,21.311) ; Q1.1 Q1.1@9.047,48.448 ; v1(11.328,44.958) 11.328,46.167 Q1.1@9.047,48.448 ; v1(14.757,53.086) 14.723,53.086 14.673,53.136 U2.38 11.963,53.136 ; v1(15.596,21.285) 23.774,13.106 R5.2 23.774,5.652 24.346,5.08 24.409,5.08 25.933,3.556 43.84,3.556 45.618,5.334 45.682,5.334 R4.2@46.253,5.906 ; v1(18.028,44.685) 18.58,45.237 18.58,46.343 U2.5 ; v1(22.123,52.324) 22.129,52.33 24.155,52.33 ; C5.2 v1(23.266,25.146) ; v1(23.266,55.118) 23.266,53.219 24.155,52.33 ; v1(23.668,28.346) 23.766,28.346 24.536,29.117 U4.19 ; v1(25.044,57.531) 26.314,58.801 R2.2 ; U3.8 31.902,50.984 C4.2 30.631,49.01 30.301,49.34 29.68,49.34 R1.2 29.045,49.911 26.62,52.336 U2.17 25.367,52.33 24.155,52.33 ; R4.2 R4.2@46.253,5.906 ; v1(69.113,2.794) 69.113,5.652 68.542,5.08 68.478,5.08 66.954,3.556 48.666,3.556 46.888,5.334 46.825,5.334 R4.2@46.253,5.906 ; R3.2 R8.2 ; Q1.1@9.047,48.448 11.963,51.364 11.963,53.136
  Top Layer w0.508: U4.19 U4.19@24.536,30.353
  Bottom Layer w0.381: v2(11.227,21.311) 11.24,21.298 15.583,21.298 v1(15.596,21.285) ; v1(14.757,53.086) 21.361,53.086 v1(22.123,52.324) ; v1(18.028,44.685) 11.602,44.685 v1(11.328,44.958) 9.804,43.434 9.804,32.766 11.201,31.369 11.201,21.336 11.252,21.285 v1(15.596,21.285) ; v1(23.266,55.118) 23.291,55.142 23.291,55.777 v1(25.044,57.531) ; v1(23.668,28.346) 23.668,25.548 v1(23.266,25.146) 19.406,21.285 v1(15.596,21.285) ; v1(69.113,2.794) 75.735,2.794 78.826,5.885 78.826,9.887 81.893,12.954 VAR.3
XTAL1: C2.1 CRYS_16.2 U2.8 | length 21.5
  Top Layer w0.381: U2.8 20.992,55.638 v1(21.996,56.642) ; C2.1@21.996,61.329 22.022,61.304 v1(22.022,59.741)
  Top Layer w0.508: C2.1@21.996,61.329 C2.1 22.008,63.385 22.803,64.18 22.803,64.228 23.599,65.024 CRYS_16.2
  Bottom Layer w0.381: v1(21.996,56.642) 22.022,56.667 v1(22.022,59.741)
XTAL2: C3.1 CRYS_16.1 U2.7 | length 21.5
  Top Layer w0.381: v1(19.202,56.642) 20.192,55.652 U2.7 ; v1(19.202,59.944) C3.1
  Top Layer w0.508: CRYS_16.1 17.599,65.024 18.395,64.228 19.202,63.421 C3.1
  Bottom Layer w0.381: v1(19.202,56.642) v1(19.202,59.944)
pads on no net: U1.4 U2.2 U2.13 U2.14 U2.15 U2.21 U2.22 U2.23 U2.24 U2.25 U2.26 U2.27 U2.29 U2.30 U2.31 U2.32 U2.33 U2.34 U2.35 U2.36 U2.37 U2.40 U2.41 U2.43 U3.7 U4.24 u_USB.0 u_USB.2 u_USB.3 u_USB.4 u_USB.SH

## Polygon pours and split planes (outlines as drawn)
no net on Top Overlay "NONET_L01_P-001" (solid): 86.995,0 86.995,68.199 0,68.199 0,0
no net on Bottom Layer "NONET_L02_P006" (solid, pour order 6): 0,0 0,68.199 86.995,68.199 86.995,0
no net on Top Layer "NONET_L01_P007" (solid, pour order 7): 0,0 0,68.199 86.995,68.199 86.995,0 0,0

## Silkscreen, mask and mechanical layers (free items; w line width, h text height)
Bottom Overlay:
  text "Perpetual Calendar ver01 / Designed by: VTMKhoi - DPEE Lab" at 57.963,62.916 h1.02
Mechanical 1:
  the board outline again, w0.5

## Text inside footprints (layer, text, board x,y; h text height)
BAT: Mechanical 13 "+" at 73.381,52.959 h1.42 r270; Mechanical 13 "-" at 73.279,31.242 h1.42 r270
BUZZ: Top Overlay "+" at 7.048,36.309 h1.52 r270
D1: Bottom Overlay "6" at 38.379,43.536 h1.52; Bottom Overlay "1" at 55.728,43.586 h1.52
D2: Bottom Overlay "1" at 55.728,20.726 h1.52; Bottom Overlay "6" at 38.379,20.676 h1.52
U3: Mechanical 13 "*" at 36.627,51.803 h1.27 r180; Top Overlay "*" at 37.992,50.648 h1.27 r180